# Altium PCB Copy of PCB1.PcbDoc
Units mm, origin at the board's own origin, x right, y up, seen from the top; angles counter-clockwise.
Board outline 113.79 x 108.71 mm, 2 copper layers (Top Layer, Bottom Layer); 82 components, 53 nets, 260 pads, 1 vias.
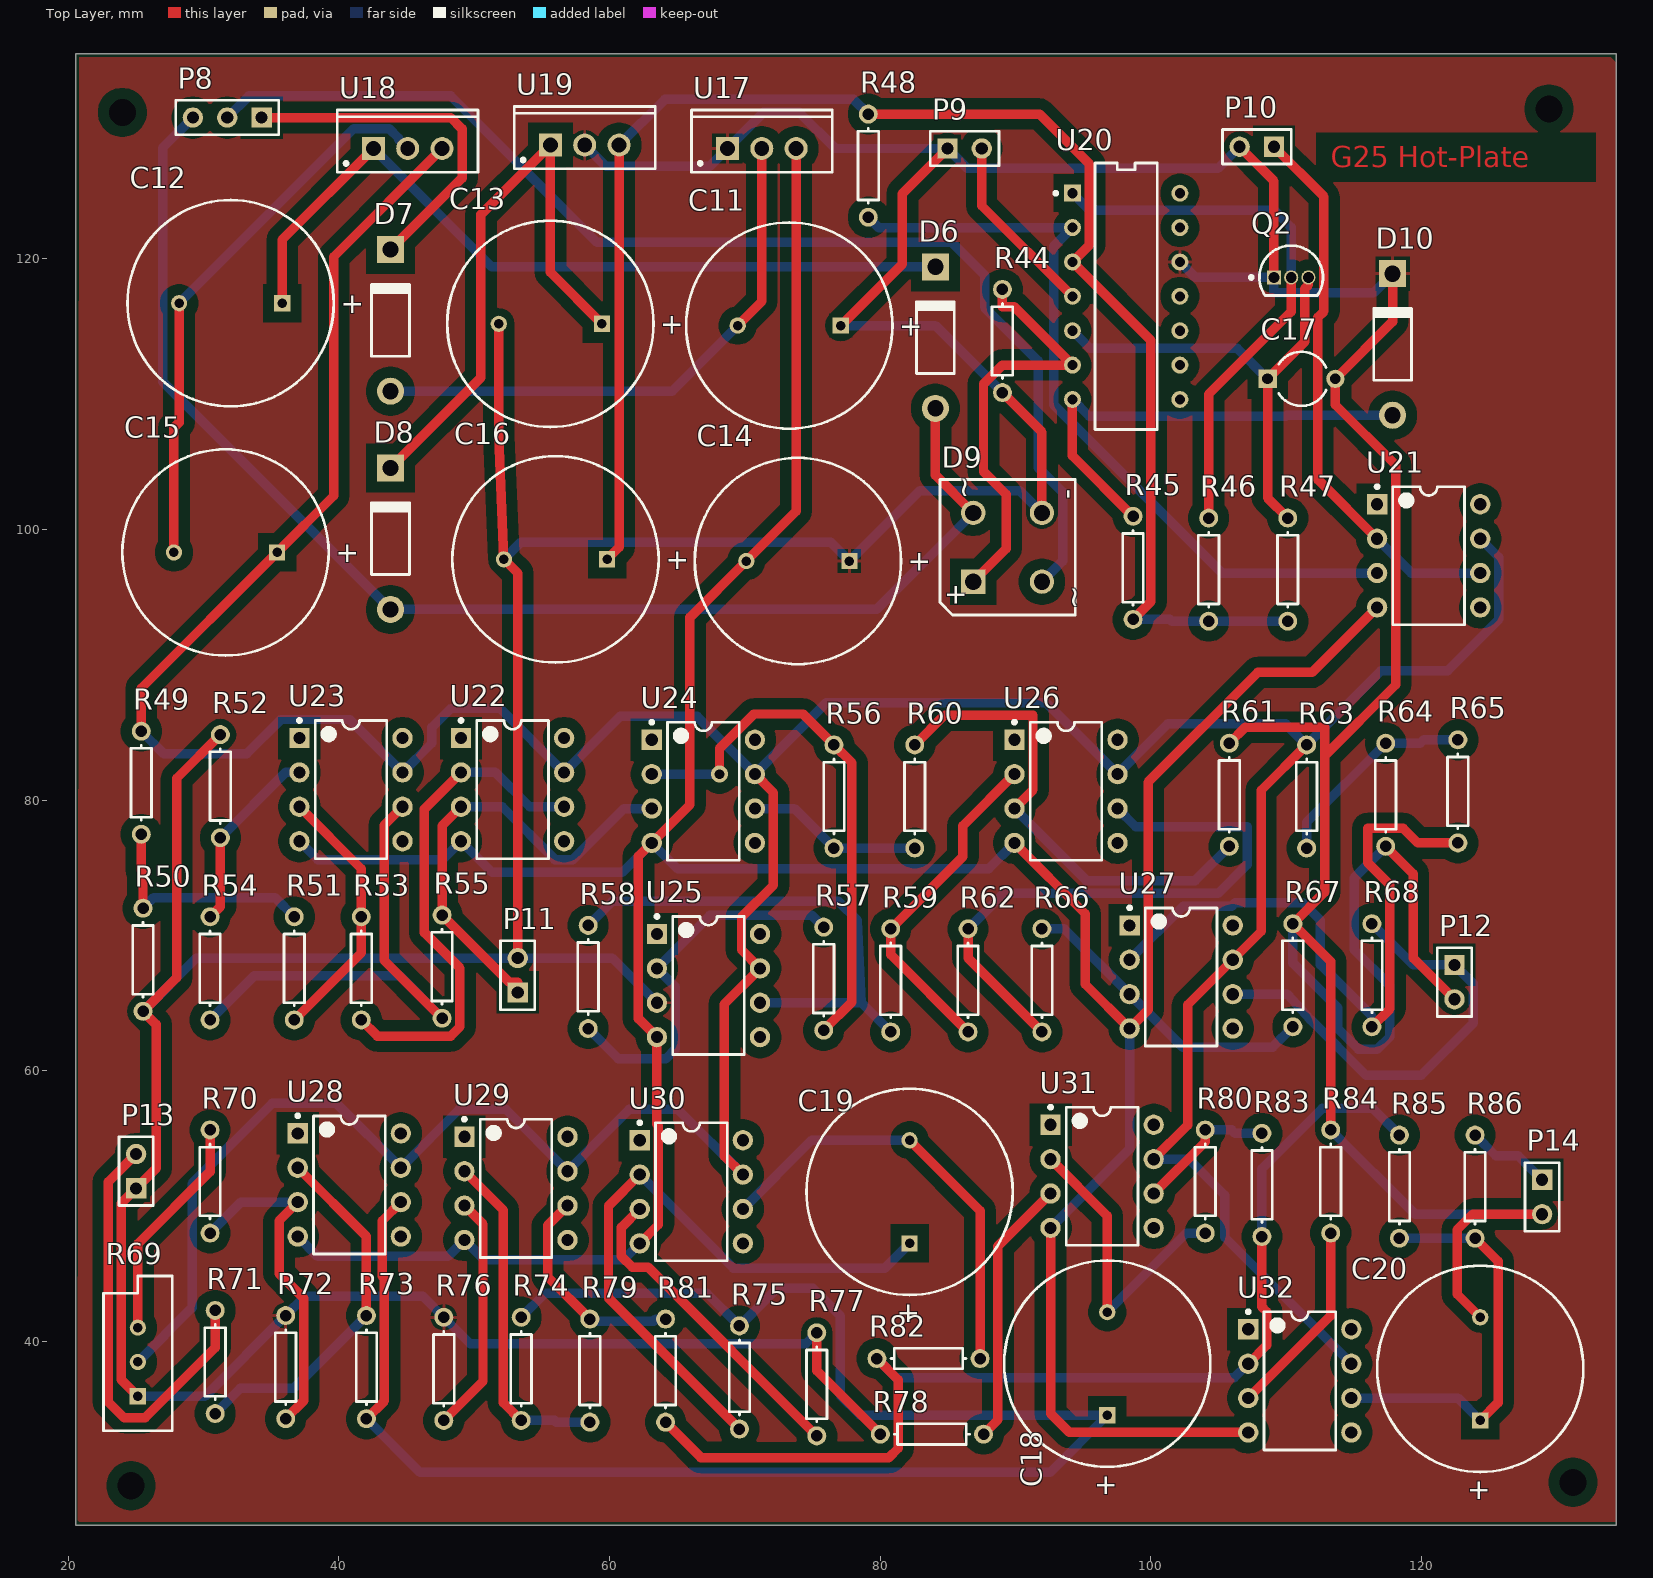
[diagram p0: Top Layer view]
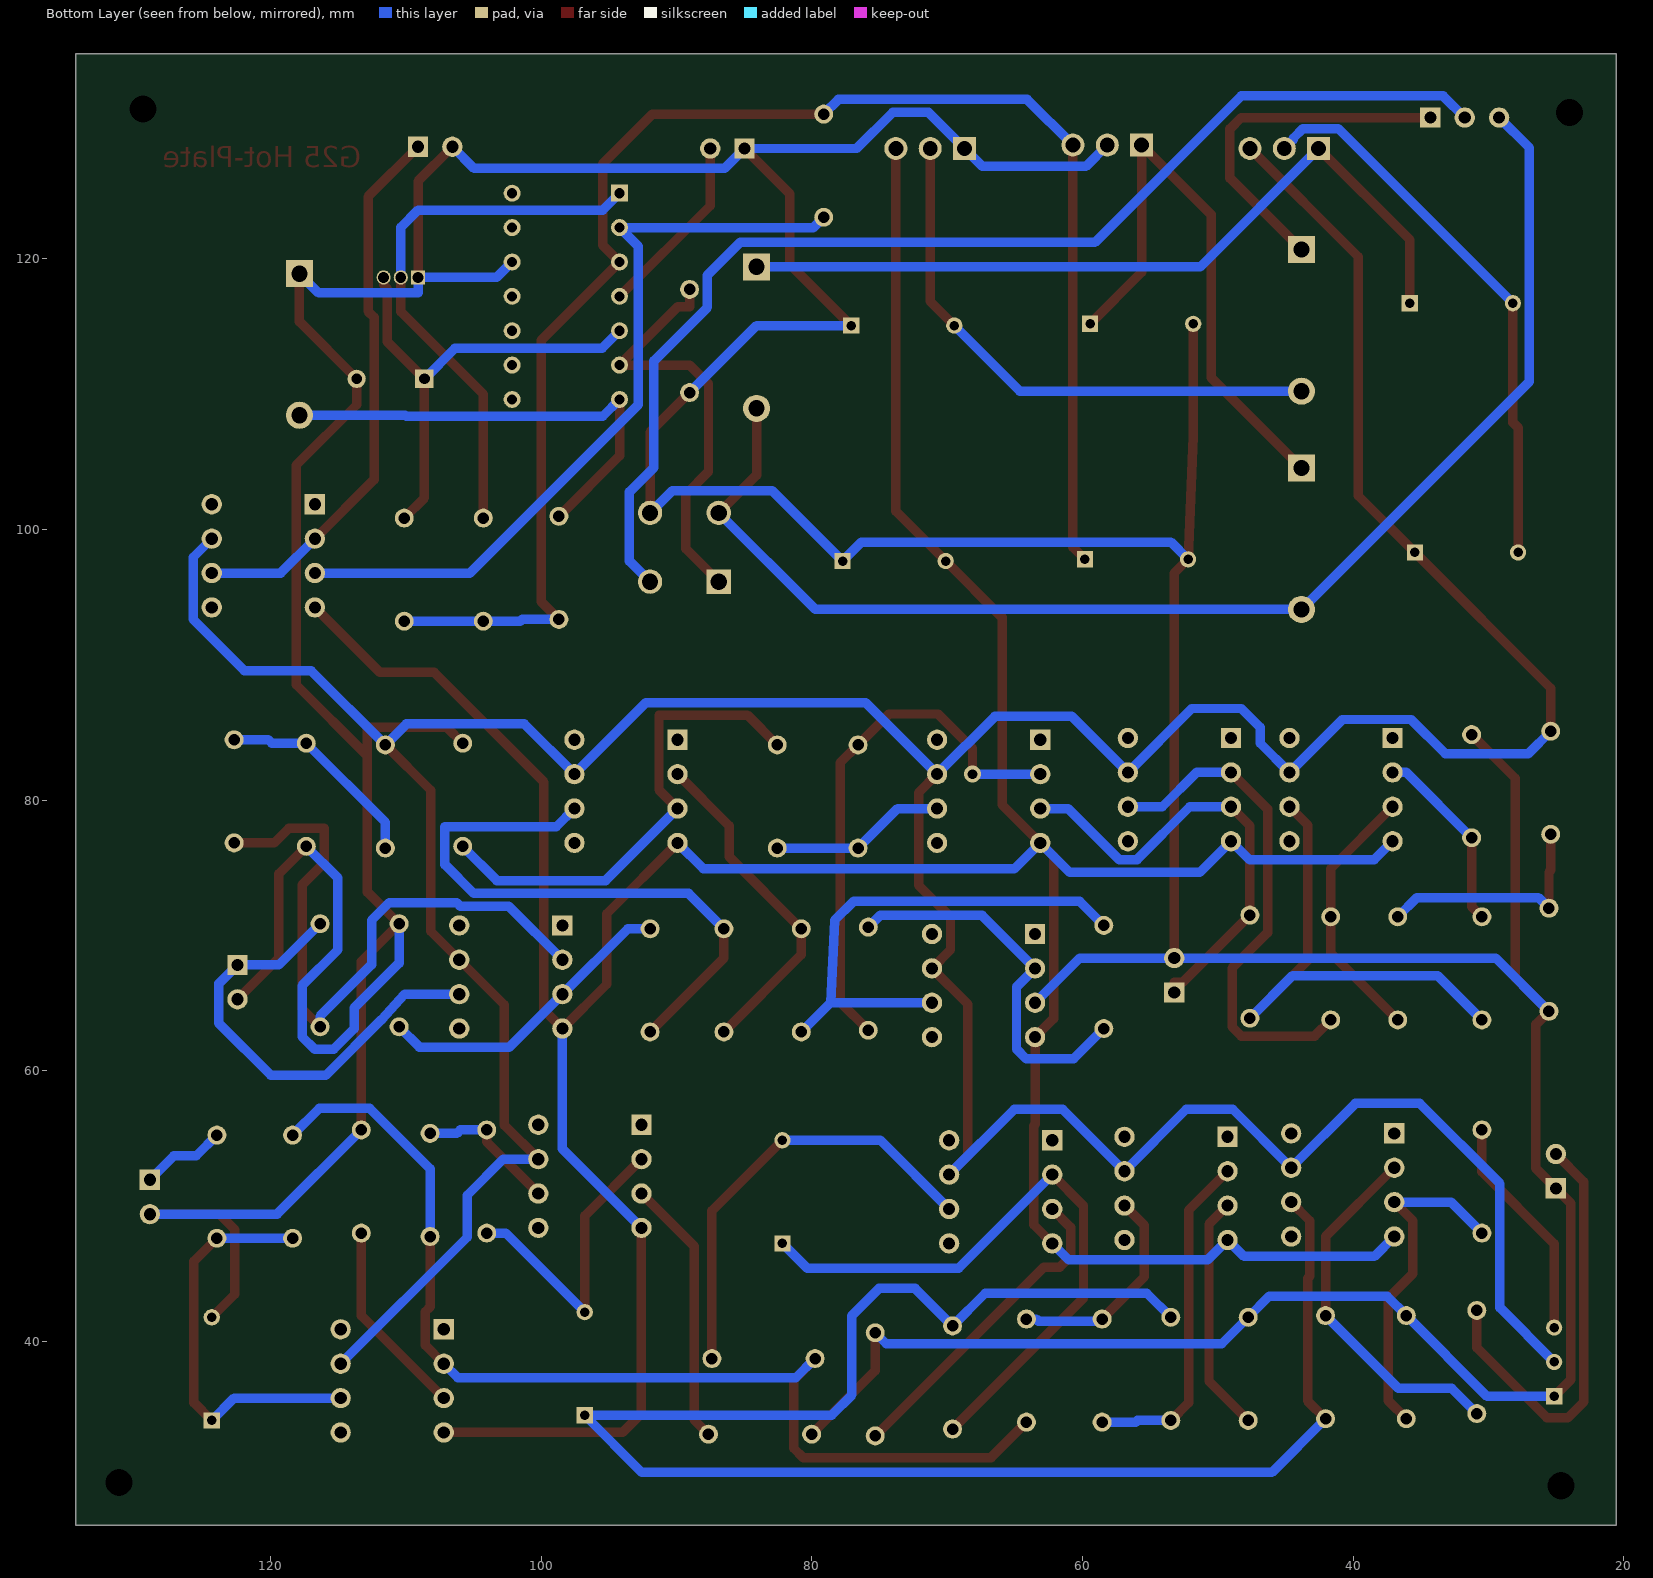
[diagram p1: Bottom Layer view, seen from below]

## Layer stack, top to bottom
Top Solder: solder mask 0.0102, Solder Resist, Dk 3.5
Top Layer: signal copper 0.0356
Dielectric 1: dielectric 0.32, FR-4, Dk 4.8
Bottom Layer: signal copper 0.0356
Bottom Solder: solder mask 0.0102, Solder Resist, Dk 3.5

## Board outline
20.574,26.416 134.366,26.416 134.366,135.128 20.574,135.128

## Design rules (kind name [scope] priority, off if disabled: settings)
Clearance "PolyGon Pour Clearence" [InPolygon] p1: gap=0.8 ignorepadtopadclearanceinfootprint=FALSE
Clearance [All] p2: gap=0.254 ignorepadtopadclearanceinfootprint=FALSE except(0: Arc-Hole Track-Hole SMDPad-Hole THPad-Hole Via-Hole Fill-Hole Poly-Hole Region-Hole Text-Hole)
PolygonConnect [All] p1: connectstyle=Relief reliefconductorwidth=0.254 reliefentries=4 polygonreliefangle="90 Angle" airgapwidth=0.254
RoutingVias [All] p1: holewidth=0.711 width=1.27 viastyle="Through Hole" minholewidth=0.711 minwidth=1.27 maxholewidth=0.711 maxwidth=1.27
SolderMaskExpansion [All] p1: expansion=0.102 istentingtop=FALSE
Width [All] p1: maxlimit=0.8 minlimit=0.7 preferedwidth=0.7 minimp=50.000000 maximp=50.000000 favimp=50.000000
30 further rules are at their usual default settings.

## Classes and differential pairs
component class Triac: C11 C12 C13 C14 C15 C16 C17 D6 D7 D8 D9 D10 P8 P9 P10 Q2 R44 R45 R46 R47 U17 U18 U19 U20 U21
component class sensor: P11 P12 R49 R50 R51 R52 R53 R54 R55 R56 R57 R58 R59 R60 R61 R62 R63 R64 R65 R66 R67 R68 U22 U23 U24 U25 U26 U27
component class pid: C18 C19 C20 P13 P14 R69 R70 R71 R72 R73 R74 R75 R76 R77 R78 R79 R80 R81 R82 R83 R84 R85 R86 U28 U29 U30 U31 U32

## Components (designator, comment, footprint, x,y, rotation, side; value= is the part's Value field where it differs from the comment)
C11 "Cap Pol1" RB7.6-15 73.279,115.062 r0 top value=100uF
C12 "Cap Pol1" RB7.6-15 32.004,116.713 r0 top value=100uF
C13 "Cap Pol1" RB7.6-15 55.626,115.189 r0 top value=100uF
C14 "Cap Pol1" RB7.6-15 73.914,97.663 r0 top value=100uF
C15 "Cap Pol1" RB7.6-15 31.623,98.298 r0 top value=100uF
C16 "Cap Pol1" RB7.6-15 56.007,97.79 r0 top value=100uF
C17 "Cap2" CAPR5-4X5 111.125,111.125 r0 top value=100nF
C18 "Cap Pol1" RB7.6-15 96.774,38.354 r270 top value=4.7uF
C19 "Cap Pol1" RB7.6-15 82.169,51.054 r270 top value=1uF
C20 "Cap Pol1" RB7.6-15 124.333,37.973 r270 top value=100pF
D6 "1N4001" DO-41 84.074,114.173 r90 top
D7 "1N4001" DO-41 43.815,115.443 r90 top
D8 "1N4001" DO-41 43.815,99.314 r90 top
D9 "Bridge" D-38 89.408,98.679 r90 top
D10 "1N4001" DO-41 117.856,113.665 r90 top
P8 "12AC" HDR1X3 34.29,130.429 r180 top
P9 "SENSOR OUT" HDR1X2 84.963,128.143 r0 top
P10 "Opto coupler" HDR1X2 109.093,128.27 r180 top
P11 "PT100" HDR1X2 53.213,65.786 r90 top
P12 "SENSOR OUT" HDR1X2 122.428,67.818 r270 top
P13 "PID IN" HDR1X2 25.019,51.308 r90 top
P14 "PID OUT" HDR1X2 128.905,51.943 r270 top
Q2 "2N3904" ONSC-TO-92-3-29-11 110.363,118.618 r0 top
R44 "Res1" AXIAL-0.3 89.027,113.919 r90 top value=24K
R45 "Res1" AXIAL-0.3 98.679,97.155 r90 top value=24K
R46 "Res1" AXIAL-0.3 104.267,97.028 r90 top value=24K
R47 "Res1" AXIAL-0.3 110.109,97.028 r90 top value=24K
R48 "Res1" AXIAL-0.3 79.121,126.873 r90 top value=24K
R49 "Res1" AXIAL-0.3 25.4,81.28 r90 top value=24K
R50 "Res1" AXIAL-0.3 25.527,68.199 r90 top value=24K
R51 "Res1" AXIAL-0.3 36.703,67.564 r90 top value=24K
R52 "Res1" AXIAL-0.3 31.242,81.026 r90 top value=24K
R53 "Res1" AXIAL-0.3 41.656,67.564 r90 top value=24K
R54 "Res1" AXIAL-0.3 30.48,67.564 r90 top value=24K
R55 "Res1" AXIAL-0.3 47.625,67.691 r90 top value=3.3K
R56 "Res1" AXIAL-0.3 76.581,80.264 r90 top value=10K
R57 "Res1" AXIAL-0.3 75.819,66.802 r90 top value=1K
R58 "Res1" AXIAL-0.3 58.42,66.929 r90 top value=10K
R59 "Res1" AXIAL-0.3 80.772,66.675 r90 top value=10K
R60 "Res1" AXIAL-0.3 82.55,80.264 r90 top value=10K
R61 "Res1" AXIAL-0.3 105.791,80.391 r90 top value=10K
R62 "Res1" AXIAL-0.3 86.487,66.675 r90 top value=10K
R63 "Res1" AXIAL-0.3 111.506,80.264 r90 top value=25K
R64 "Res1" AXIAL-0.3 117.348,80.391 r90 top value=25K
R65 "Res1" AXIAL-0.3 122.682,80.645 r270 top value=25K
R66 "Res1" AXIAL-0.3 91.948,66.675 r90 top value=25K
R67 "Res1" AXIAL-0.3 110.49,67.056 r90 top value=25K
R68 "Res1" AXIAL-0.3 116.332,67.056 r90 top value=25K
R69 "RPot" VR5 25.146,38.481 r90 top value=22K
R70 "Res1" AXIAL-0.3 30.48,51.816 r90 top value=24K
R71 "Res1" AXIAL-0.3 30.861,38.481 r90 top value=24K
R72 "Res1" AXIAL-0.3 36.068,38.1 r90 top value=24K
R73 "Res1" AXIAL-0.3 42.037,38.1 r90 top value=24K
R74 "Res1" AXIAL-0.3 53.467,37.973 r90 top value=10K
R75 "Res1" AXIAL-0.3 69.596,37.338 r90 top value=14.7K
R76 "Res1" AXIAL-0.3 47.752,37.973 r90 top value=24K
R77 "Res1" AXIAL-0.3 75.311,36.83 r90 top value=24K
R78 "Res1" AXIAL-0.3 83.82,33.147 r180 top value=24K
R79 "Res1" AXIAL-0.3 58.547,37.846 r270 top value=16.87K
R80 "Res1" AXIAL-0.3 104.013,51.816 r270 top value=3.65K
R81 "Res1" AXIAL-0.3 64.135,37.846 r90 top value=10K
R82 "Res1" AXIAL-0.3 83.566,38.735 r0 top value=10K
R83 "Res1" AXIAL-0.3 108.204,51.562 r90 top value=10K
R84 "Res1" AXIAL-0.3 113.284,51.816 r90 top value=24K
R85 "Res1" AXIAL-0.3 118.364,51.435 r90 top value=10K
R86 "Res1" AXIAL-0.3 123.952,51.435 r270 top value=10K
U17 "L7912CV" TO-220 71.247,128.143 r0 top
U18 "L7812CV" TO220 45.085,128.143 r0 top
U19 "L7812CV" TO220 58.166,128.397 r0 top
U20 "LM339N" FP-N0014A-MFG 98.171,117.221 r0 top
U21 "UA741CP" P0008A 120.523,98.044 r0 top
U22 "UA741CP" P0008A 52.832,80.772 r0 top
U23 "UA741CP" P0008A 40.894,80.772 r0 top
U24 "UA741CP" P0008A 66.929,80.645 r0 top
U25 "UA741CP" P0008A 67.31,66.294 r0 top
U26 "UA741CP" P0008A 93.726,80.645 r0 top
U27 "UA741CP" P0008A 102.235,66.929 r0 top
U28 "UA741CP" P0008A 40.767,51.562 r0 top
U29 "UA741CP" P0008A 53.086,51.308 r0 top
U30 "UA741CP" P0008A 66.04,51.054 r0 top
U31 "UA741CP" P0008A 96.393,52.197 r0 top
U32 "UA741CP" P0008A 110.998,37.084 r0 top

## Footprints (in the part's own frame and the unit in brackets; to place one, negate y for a bottom-side part, rotate by r counter-clockwise, add the part's x,y. Pads: shape width x height; smd on the part's side, far side on the other; paste and mask are expansions set on the pad)
AXIAL-0.3 [mm] "Axial Device, Thru-Hole; 2 Leads; 0.3 in Pin Spacing"
  round 1.4 hole 0.85: 1(-3.81,0) 2(3.81,0)
  silkscreen extent -2.77,-0.76 2.77,0.76
CAPR5-4X5 [mm] "Capacitor; 2 Leads"
  rect 1.35x1.35 hole 0.8: 1(-2.5,0)
  round 1.35 hole 0.8: 2(2.5,0)
  silkscreen extent -1.69,-2 1.82,2
D-38 [mm] "Bridge Rectifier; 4 Terminals; Body 9.4 x 9.4 mm (typ); Pitch 5.08 mm"
  rect 1.8x1.8 hole 1.2: 1(-2.54,2.54)
  round 1.8 hole 1.2: 2(-2.54,-2.54) 3(2.54,-2.54) 4(2.54,2.54)
  silkscreen extent -5,-5 5,5, body extent -5,-5 5,5, height 9.91
DO-41 [mm] "Diode, Axial; Body 5.2 x 2.7 mm (LxDia. max), Lead Dia. 0.86 mm (max)"
  round 2 hole 1.2: 1(-5.23,0)
  rect 2x2 hole 1.2: 2(5.23,0)
  silkscreen extent -2.65,-1.4 2.75,1.4
FP-N0014A-MFG [mm]
  rect 1.25x1.25 hole 0.75 paste-1000 mask+0: 1(-3.97,7.62)
  round 1.25 hole 0.75 paste-1000 mask+0: 2(-3.97,5.08) 3(-3.97,2.54) 4(-3.97,0) 5(-3.97,-2.54) 6(-3.97,-5.08) 7(-3.97,-7.62) 8(3.97,-7.62) 9(3.97,-5.08) 10(3.97,-2.54) 11(3.97,0) 12(3.97,2.54) 13(3.97,5.08) 14(3.97,7.62)
  silkscreen extent -5.32,-9.84 2.3,9.84, body extent -4.69,-9.94 4.69,9.94, height 0.25
HDR1X2 [mm] "Connector; Header; 2 Position"
  rect 1.5x1.5 hole 0.9: 1(0,0)
  round 1.5 hole 0.9: 2(2.54,0)
  silkscreen extent -1.27,-1.27 3.81,1.27
HDR1X3 [mm] "Connector; Header; 3 Position"
  rect 1.5x1.5 hole 0.9: 1(0,0)
  round 1.5 hole 0.9: 2(2.54,0) 3(5.08,0)
  silkscreen extent -1.27,-1.27 6.35,1.27
ONSC-TO-92-3-29-11 [mm] "TO, 3-Leads, Body Dia 4.7mm, Pitch 1.27mm"
  rect 1.05x1.05 hole 0.8: 1(-1.27,0)
  round 1.05 hole 0.8: 2(0,0) 3(1.27,0)
  silkscreen extent -3.07,-1.34 2.35,2.35, body extent -2.35,-1.33 2.36,2.36, height 7.87
P0008A [mm] "DIP, 8-Leads, Body 10.15x6.6mm, Pitch 2.54mm"
  rect 1.5x1.5 hole 0.9: 1(-3.81,3.81)
  round 1.5 hole 0.9: 2(-3.81,1.27) 3(-3.81,-1.27) 4(-3.81,-3.81) 5(3.81,-3.81) 6(3.81,-1.27) 7(3.81,1.27) 8(3.81,3.81)
  silkscreen extent -3.93,-5.1 2.65,5.23, body extent -3.95,-5.07 3.95,5.07, height 5.08
RB7.6-15 [mm] "Polarized Capacitor (Radial); 2 Leads"
  rect 1.2x1.2 hole 0.7: 1(3.81,0)
  round 1.2 hole 0.7: 2(-3.81,0)
  silkscreen extent -7.62,-7.62 7.62,7.62
TO220 [mm] "TO, Thru-Hole, Vertical, Heatsink Mounted; 3 In-Line Leads; Pitch 2.54 mm"
  rect 1.7x1.7 hole 1.1: 1(-2.54,0)
  round 1.7 hole 1.1: 2(0,0) 3(2.54,0)
  silkscreen extent -5.2,-1.75 5.2,2.85, body extent -5.25,-1.8 5.25,2.9, height 19.7
TO-220 [mm] "TO, Thru-Hole, Vertical, Heatsink Mounted; 3 In-Line Leads; Pitch 2.54 mm"
  rect 1.7x1.7 hole 1.1: 1(-2.54,0)
  round 1.7 hole 1.1: 2(0,0) 3(2.54,0)
  silkscreen extent -5.2,-1.75 5.2,2.85, body extent -5.25,-1.8 5.25,2.9, height 19.7
VR5 [mm] "Thru-Hole; 3 Leads"
  rect 1.2x1.2 hole 0.7: 1(-2.54,0)
  round 1.2 hole 0.7: 2(0,0) 3(2.54,0)
  silkscreen extent -5.08,-2.54 6.35,2.54

## Part data
C11 C12 C13 C14 C15 C16 C18 C19 C20: "Polarized Capacitor (Radial)", LatestRevisionDate=17-Jul-2002, LatestRevisionNote="Re-released for DXP Platform.", PackageDescription="Polarized Capacitor (Radial); 2 Leads", PackageReference=RB7.6-15, Published=8-Jun-2000, Publisher="Altium Limited"
C17: "Capacitor", PackageDescription="Capacitor; 2 Leads", PackageReference=CAPR5-4X5, Published=23-Sep-2002, Publisher="Altium Limited"
D6 D7 D8 D10: library part "Diode 1N4001", "1 Amp General Purpose Rectifier", Code_JEDEC=DO-204-AL, ComponentLink1Description="Manufacturer Link", ComponentLink1URL=http://www.fairchildsemi.com/, ComponentLink2Description=Datasheet, ComponentLink2URL=http://www.fairchildsemi.com/ds/1N%2F1N4001.pdf, DatasheetVersion=1998, LatestRevisionDate=17-Jul-2002, LatestRevisionNote="Re-released for DXP Platform.", PackageDescription="Diode, Axial; Body 5.2 x 2.7 mm (LxDia. max), Lead Dia. 0.86 mm (max)", PackageReference=DO-41, PackageVersion=Aug-1999, Published=8-Jun-2000, Publisher="Altium Limited"
D9: library part Bridge1, "Full Wave Diode Bridge", DatasheetVersion=E2732B, LatestRevisionDate=29-May-2009, LatestRevisionNote="Sch pins A & K swapped.", PackageDescription="Bridge Rectifier; 4 Terminals; Body 9.4 x 9.4 mm (typ); Pitch 5.08 mm", PackageReference=D-38, Published=8-Jun-2000, Publisher="Altium Limited"
P8: library part "Header 3", "Header, 3-Pin", LatestRevisionDate=17-Jul-2002, LatestRevisionNote="Re-released for DXP Platform.", Publisher="Altium Limited"
P9 P10 P11 P12 P13 P14: library part "Header 2", "Header, 2-Pin", LatestRevisionDate=17-Jul-2002, LatestRevisionNote="Re-released for DXP Platform.", Publisher="Altium Limited"
Q2: library part CMP-2000-05562-1, "General Purpose Transistor, NPN Silicon, 200 mA, 60 V, -55 to 150 degC, 3-Pin TO-92, RoHS, Bulk", Collector- Base Voltage VCBO=60V, Collector- Emitter Voltage VCEO Max=40V, Collector-Emitter Saturation Voltage=0.3V, Emitter- Base Voltage VEBO=6V, Manufacturer=ONSemiconductor, Maximum DC Collector Current=0.2A, Maximum Operating Temperature=+150C, Maximum Power Dissipation=625mW, Minimum Operating Temperature=-65C, Package / Case=TO-92-3(TO-226), Package Description="3-Pin Transistor Outline, Body 4.825 x 3.685 mm, Pitch 1.27 mm", Package Reference=TO-92-3-29-11, Brand=ONSemiconductor, Configuration=Single, Datasheet URL=https://datasheet.ciiva.com/4725/2n3903-d-285841-4725808.pdf, Datasheet Version="Rev. 8, 08/2012", DC Collector/Base Gain hfe Min=60, Factory Pack Quantity=5000, Gain Bandwidth Product fT=270MHz, Manufacturer URL=http://www.onsemi.com/, Mounting Style=ThroughHole, Mounting Technology=ThroughHole, Packaging=Bulk, Product Category=BipolarTransistors-BJT, RoHS=Details, Transistor Polarity=NPN
R44 R45 R46 R47 R48 R49 R50 R51 R52 R53 R54 R55 R56 R57 R58 R59 R60 R61 R62 R63 R64 R65 R66 R67 R68 R70 R71 R72 R73 R74 R75 R76 R77 R78 R79 R80 R81 R82 R83 R84 R85 R86: "Resistor", LatestRevisionDate=17-Jul-2002, LatestRevisionNote="Re-released for DXP Platform.", PackageDescription="Axial Device, Thru-Hole; 2 Leads; 0.3 in Pin Spacing", PackageReference=AXIAL-0.3, Published=8-Jun-2000, Publisher="Altium Limited"
R69: "Potentiometer", LatestRevisionDate=17-Jul-2002, LatestRevisionNote="Re-released for DXP Platform.", PackageDescription="Variable Resistor, Thru-Hole; 3 Leads", PackageReference=VR5, Published=8-Jun-2000, Publisher="Altium Limited", Set Position=0.5, Sim Note="Enter the Resistance value and the set point into parameter fields."
U17: library part CMP-0244-00457-1, "Negative Voltage Regulator, -12V, 3-Pin TO-220", ComponentLink1Description="Manufacturer URL", ComponentLink1URL=http://www.st.com, ComponentLink2Description=Datasheet, ComponentLink2URL=http://www.st.com/internet/com/TECHNICAL_RESOURCES/TECHNICAL_LITERATURE/DATASHEET/CD00000450.pdf, DatasheetVersion=1/11/2011, PackageDescription="TO, Thru-Hole, Vertical, Heatsink Mounted; 3 In-Line Leads; Pitch 2.54 mm", PackageReference=TO-220, PackageVersion=2011
U18 U19: library part CMP-0244-00450-1, "Positive Voltage Regulator, 12V, 3-Pin TO-220", ComponentLink1Description="Manufacturer URL", ComponentLink1URL=http://www.st.com, ComponentLink2Description=Datasheet, ComponentLink2URL=http://www.st.com/internet/com/TECHNICAL_RESOURCES/TECHNICAL_LITERATURE/DATASHEET/CD00000444.pdf, ComponentLink3Description="Package Specification", ComponentLink3URL=http://www.st.com/internet/com/TECHNICAL_RESOURCES/TECHNICAL_LITERATURE/PACKAGE_INFORMATION/CD00004649.pdf, DatasheetVersion=16/11/2011, PackageDescription="TO, Thru-Hole, Vertical, Heatsink Mounted; 3 In-Line Leads; Pitch 2.54 mm", PackageReference=TO220, PackageVersion=ver3.0
U20: library part CMP-0055-00143-4, "IC QUAD DIFF COMPARATOR 14-DIP", Case/Package=PDIP, Dual Supply Voltage=9V, Input Bias Current=250nA, Input Offset Voltage (Vos)=5mV, Max Dual Supply Voltage=15V, Max Operating Temperature=70°C, Max Power Dissipation=1.05W, Max Supply Current=500uA, Max Supply Voltage=30V, Min Dual Supply Voltage=1V, Min Operating Temperature=0°C, Min Supply Voltage=2V, Nominal Supply Current=2mA, Output Current=20mA, Output Current per Channel=6mA, Package Quantity=25, Power Dissipation=1.05kW, Quiescent Current=2.5mA, Voltage Gain=106.02dB, Contact Plating=Gold, Height=4.57mm, Lead Free="Lead Free", Length=19.3mm, Max Input Current=250nA, Mount="Through Hole", Number of Channels=4, Number of Elements=4, Number of Pins=14, Output Type=TTL, Packaging=Rail/Tube, Radiation Hardening=No, REACH SVHC="No SVHC", Response Time=1.3us, Weight=0.032734oz, Width=6.35mm
U21 U22 U23 U24 U25 U26 U27 U28 U29 U30 U31 U32: library part CMP-0017-00973-2, "General-Purpose Operational Amplifier, 7 to 36 V, 0 to 70 degC, 8-pin DIP (P8), Pb-Free (RoHS)", Manufacturer="Texas Instruments", Total Supply Voltage(Max)(+5V is 5, +/-5V is 10)=36, Total Supply Voltage(Min)(+5V is 5, +/-5V is 10)=7, CMRR(Min)(dB)=70, Code_JEDEC=MS-001, ComponentLink1Description="Manufacturer URL", ComponentLink1URL=http://www.ti.com/, ComponentLink2Description=Datasheet, ComponentLink2URL=http://www.ti.com/lit/ds/symlink/ua741.pdf, ComponentLink3Description="Package Specification", ComponentLink3URL=http://www.ti.com/litv/pdf/mpdi001b, DatasheetVersion=SLOS094B, Eco-Plan="Pb-Free (RoHS)", GBW(Typ)(MHz)=1, IIB(Max)(pA)=800000, Iq per channel(Max)(mA)=2.8, Mounting Technology="Through Hole", Number of Channels=1, PackageDescription="8-Pin Plastic In-Line, Body 9.59 x 6.35 mm, Pitch 2.54 mm", PackageReference=P0008A, PackageVersion="4040082/E, 04/2010", PartNumber=UA741CP, Slew Rate(Typ)(V/us)=0.5, Sub Family="General Purpose Amplifier, High Supply Voltage Amplifier (>=30V)", Vio (25C)(Max)(mV)=6

## Free pads (board coordinates)
  round 1.524 hole 2: 33(129.413,131.064) 37(131.191,29.591) 38(24.638,29.337) 39(24.003,130.81)

## Via types
v1: diameter 1.27, hole 0.711, Top Layer to Bottom Layer, 1 vias

## Nets (pads, with @x,y where several pads share a name; then routed paths per layer and width w, separated by ;. In a path a pad name is that pad's centre, name@x,y a point inside that pad or via, vN(x,y) a via of type N, cw(c..) or ccw(c..) an arc to the next point about the centre after c; other vN are vias at no path point)
+12V: C15.1 R49.2 R63.2 R69.2 U18.3 U21.7 U22.7 U23.7 U24.7 U25.7 U26.7 U27.7 U28.7 U29.7 U30.7 U31.7 U32.7 | length 339.8
  Top Layer w0.7: R49.2 25.4,88.265 C15.1 39.624,102.489 39.624,120.142 U18.3 ; U30.7 68.478,53.696 68.478,64.922 U25.7 69.748,68.936 69.748,71.349 72.111,73.711 72.111,80.543 U24.7 ; U31.7 102.718,55.982 102.718,64.872 U27.7 108.153,70.307 108.153,80.721 R63.2
  Bottom Layer w0.7: R69.2 29.159,42.494 29.159,51.664 35.077,57.582 39.827,57.582 U28.7 48.895,57.15 52.324,57.15 U29.7 61.468,57.15 65.024,57.15 U30.7 ; R49.2 27.051,83.439 33.198,83.439 35.712,85.954 40.792,85.954 U23.7 46.863,84.201 46.863,85.369 48.26,86.766 51.918,86.766 U22.7 60.782,86.182 66.472,86.182 U24.7 76.022,87.198 92.253,87.198 U26.7 101.244,85.623 109.957,85.623 R63.2 116.992,89.56 121.92,89.56 125.705,93.345 125.705,97.942 U21.7 ; U31.7 102.794,53.467 105.461,50.8 105.461,47.701 U32.7
-12V: C14.2 U17.3 U21.4 U22.4 U23.4 U24.4 U25.4 U26.4 U27.4 U28.4 U29.4 U30.4 U31.4 U32.4 | length 276.1
  Top Layer w0.7: U30.4 63.602,48.616 63.602,55.931 63.5,56.032 U25.4 62.128,63.856 62.128,75.844 U24.4 65.941,79.657 65.941,93.5 C14.2 73.787,101.346 U17.3 ; U26.4 95.148,71.603 95.148,66.396 U27.4 99.797,64.491 99.797,81.331 107.899,89.433 111.912,89.433 U21.4 ; U31.4 92.583,34.671 93.98,33.274 U32.4
  Bottom Layer w0.7: U28.4 38.43,46.279 48.057,46.279 U29.4 50.749,46.025 61.011,46.025 U30.4 ; U23.4 38.456,75.59 47.65,75.59 U22.4 51.33,74.654 60.938,74.654 U24.4 65.024,74.93 88.011,74.93 U26.4 ; U31.4 98.425,54.229 U27.4
GND: C11.1 C13.2 C14.1 C16.2 C17.2 C20.2 D9.3 D10.2 P9.1 P10.2 P11.2 P12.2 P13.1 P14.2 Q2.1 R44.1 R50.1 R52.2 R61.2 R64.1 R67.2 R69.1 R72.2 R76.2 R77.2 R78.2 R84.2 U17.1 U19.2 U20.12 U25.3 | length 528.2
  Top Layer w0.7: R69.1 23.927,37.16 23.927,50.216 P13.1 26.492,52.781 26.492,63.424 R50.1 28.016,66.878 28.016,81.61 R52.2 ; C13.2 51.816,106.883 C16.2 53.213,96.774 P11.2 ; R77.2 75.311,37.846 R78.2 ; C11.1 81.636,119.609 81.636,124.816 P9.1 ; R44.1 91.948,107.188 D9.3 ; R61.2 106.985,85.395 112.827,85.395 112.827,83.261 ; P10.2 109.093,125.73 Q2.1 ; R84.2 113.284,68.072 R67.2 112.827,73.203 112.827,83.261 ; R64.1 119.38,74.549 119.38,68.326 P12.2 ; D10.2 117.856,115.356 C17.2 113.625,109.209 118.085,104.75 118.085,88.519 112.827,83.261 ; C20.2 122.631,43.485 122.631,48.26 123.774,49.403 P14.2
  Bottom Layer w0.7: R69.1 30.099,35.941 R72.2 37.49,43.332 46.203,43.332 R76.2 49.708,39.827 74.498,39.827 R77.2 ; R50.1 29.464,68.326 P11.2 60.198,68.326 U25.3 ; C16.2 53.467,99.06 76.327,99.06 C14.1 82.906,102.845 90.322,102.845 D9.3 ; U19.2 59.741,126.822 67.386,126.822 U17.1 71.374,130.81 74.016,130.81 76.683,128.143 P9.1 86.436,126.67 104.953,126.67 P10.2 ; C11.1 84.074,115.062 R44.1 ; U20.12 103.284,118.618 Q2.1 109.093,117.475 116.436,117.475 D10.2 ; R67.2 110.49,67.957 113.811,64.636 113.811,63.1 115.316,61.595 116.738,61.595 117.653,62.509 117.653,66.294 115.011,68.936 115.011,74.244 R64.1 ; R84.2 119.507,49.403 P14.2
NetC11_2: C11.2 D7.1 U17.2 | length 41.5
  Top Layer w0.7: C11.2 71.247,116.84 U17.2
  Bottom Layer w0.7: D7.1 64.62,110.213 C11.2
NetC12_1: C12.1 D6.2 U18.1 | length 59.4
  Top Layer w0.7: C12.1 35.814,121.412 U18.1
  Bottom Layer w0.7: U18.1 51.285,119.403 D6.2
NetC12_2: C12.2 C15.2 U18.2 | length 41.5
  Top Layer w0.7: C15.2 27.813,107.518 28.194,107.899 C12.2
  Bottom Layer w0.7: C12.2 41.097,129.616 43.713,129.616 44.425,128.905 44.425,128.803 U18.2
NetC13_1: C13.1 D8.2 U19.1 | length 43.5
  Top Layer w0.7: D8.2 50.495,111.224 50.495,123.266 U19.1 55.626,118.999 C13.1
NetC16_1: C16.1 R45.1 R46.1 R47.1 R48.2 U19.3 U20.3 | length 117.7
  Top Layer w0.7: C16.1 60.706,98.679 U19.3 ; R48.2 91.77,130.683 95.453,127 95.453,121.013 U20.3 100,113.962 100,94.666 R45.1
  Bottom Layer w0.7: U19.3 64.084,131.775 78.029,131.775 R48.2 ; R45.1 101.397,93.345 101.524,93.218 R46.1 R47.1
NetC17_1: C17.1 Q2.3 R47.2 U20.5 | length 35.5
  Top Layer w0.7: R47.2 108.625,102.322 C17.1 111.354,113.854 111.354,117.78 111.633,118.059 Q2.3
  Bottom Layer w0.7: U20.5 95.496,113.386 106.364,113.386 C17.1
NetC18_1: C18.1 R73.1 R74.2 R75.2 U28.6 | length 128.8
  Top Layer w0.7: R73.1 43.358,35.611 43.358,44.653 43.205,44.806 43.205,48.92 U28.6
  Bottom Layer w0.7: R73.1 45.999,30.328 92.558,30.328 C18.1 78.537,34.544 77.038,36.043 77.038,41.91 75.032,43.917 72.365,43.917 R75.2 67.18,43.564 55.248,43.564 R74.2
NetC18_2: C18.2 R80.2 U31.2 | length 22.7
  Top Layer w0.7: U31.2 96.774,49.276 C18.2
  Bottom Layer w0.7: C18.2 102.616,48.006 R80.2
NetC19_1: C19.1 R75.1 U30.2 | length 47.3
  Top Layer w0.7: U30.2 59.922,50.016 59.922,43.202 R75.1
  Bottom Layer w0.7: U30.2 69.139,45.415 80.34,45.415 C19.1
NetC19_2: C19.2 R82.2 U30.6 | length 32.7
  Top Layer w0.7: C19.2 87.376,49.657 R82.2
  Bottom Layer w0.7: U30.6 74.93,54.864 C19.2
NetC20_1: C20.1 R85.1 R86.2 U32.6 | length 30.5
  Top Layer w0.7: R86.2 125.654,45.923 125.654,35.484 C20.1
  Bottom Layer w0.7: U32.6 122.682,35.814 C20.1 ; R85.1 R86.2
NetD6_1: D6.1 D8.1 D9.4 P8.3 | length 99.1
  Top Layer w0.7: D6.1 84.074,104.013 D9.4
  Bottom Layer w0.7: P8.3 26.975,128.194 26.975,110.924 D8.1 79.733,94.084 D9.4
NetD7_2: D7.2 P8.1 | length 26.3
  Top Layer w0.7: P8.1 48.26,130.429 49.098,129.591 49.098,125.956 D7.2
NetD9_1: D9.1 R44.2 U20.6 | length 31.7
  Top Layer w0.7: D9.1 89.306,98.577 89.306,102.591 87.63,104.267 87.63,110.744 89.027,112.141 U20.6 89.883,116.459 89.027,116.459 R44.2
NetD9_2: D9.2 P8.2 | length 87.8
  Bottom Layer w0.7: P8.2 33.35,132.029 48.26,132.029 59.08,121.209 85.293,121.209 87.706,118.796 87.706,116.408 91.669,112.446 91.669,104.572 93.472,102.768 93.472,97.663 D9.2
NetD10_1: D10.1 R45.2 U20.7 | length 34.7
  Top Layer w0.7: U20.7 94.201,105.443 R45.2
  Bottom Layer w0.7: U20.7 95.446,108.356 109.957,108.356 110.035,108.435 D10.1
NetP9_2: P9.2 U20.4 | length 13.7
  Top Layer w0.7: P9.2 87.503,123.919 U20.4
NetP10_1: P10.1 U21.2 U21.6 | length 41.1
  Top Layer w0.7: P10.1 112.776,124.587 112.776,116.103 112.344,115.672 112.344,103.683 U21.2
  Bottom Layer w0.7: U21.2 119.253,96.774 U21.6
NetP11_1: P11.1 R55.2 U22.3 U24.3 | length 34.3
  Top Layer w0.7: U22.3 47.625,78.105 R55.2 52.578,66.548 53.213,66.548 P11.1
  Bottom Layer w0.7: U22.3 52.07,79.502 55.964,75.608 57.295,75.608 61.062,79.375 U24.3
NetP12_1: P12.1 R68.2 U27.6 | length 34.1
  Bottom Layer w0.7: U27.6 110.084,65.659 111.785,63.776 115.897,59.665 119.964,59.665 123.8,63.5 123.8,66.446 P12.1 119.38,67.818 R68.2
NetP13_2: P13.2 R71.2 | length 32.4
  Top Layer w0.7: P13.2 22.962,51.791 22.962,35.535 24.13,34.366 25.679,34.366 30.861,39.548 R71.2
NetP14_1: P14.1 R86.1 | length 6.3
  Bottom Layer w0.7: R86.1 125.476,53.721 127.127,53.721 P14.1
NetQ2_2: Q2.2 R46.2 U20.1 | length 41.2
  Top Layer w0.7: R46.2 104.267,109.982 110.363,116.078 Q2.2
  Bottom Layer w0.7: U20.1 95.446,123.596 109.093,123.596 110.363,122.326 Q2.2
NetR48_1: R48.1 U20.2 U21.3 | length 58.1
  Bottom Layer w0.7: R48.1 79.883,122.301 U20.2 92.812,120.912 92.812,109.22 105.258,96.774 U21.3
NetR49_1: R49.1 R50.2 R51.2 | length 17.6
  Top Layer w0.7: R49.1 25.4,74.803 25.527,74.676 R50.2
  Bottom Layer w0.7: R50.2 26.314,72.796 35.281,72.796 R51.2
NetR51_1: R51.1 R53.2 U23.3 | length 19.7
  Top Layer w0.7: R51.1 41.656,68.707 R53.2 41.656,74.93 U23.3
NetR52_1: R52.1 R54.2 U23.2 | length 14
  Top Layer w0.7: R54.2 31.242,72.136 R52.1
  Bottom Layer w0.7: R52.1 36.068,82.042 U23.2
NetR53_1: R53.1 U22.2 U22.6 | length 37.7
  Top Layer w0.7: R53.1 42.85,62.56 48.26,62.56 48.946,63.246 48.946,67.581 46.321,70.206 46.321,79.341 U22.2
  Bottom Layer w0.7: U22.2 51.562,82.042 54.102,79.502 U22.6
NetR54_1: R54.1 R55.1 U23.6 | length 37.8
  Top Layer w0.7: U23.6 43.35,78.148 43.35,68.156 R55.1
  Bottom Layer w0.7: R54.1 33.757,67.031 44.475,67.031 R55.1
NetR56_1: R56.1 R60.1 U24.6 | length 13
  Bottom Layer w0.7: U24.6 73.66,79.375 R56.1 R60.1
NetR56_2: R56.2 R57.1 U24.2 | length 39.9
  Top Layer w0.7: v1(68.123,81.915) 68.123,83.82 70.663,86.36 74.295,86.36 R56.2 77.902,82.753 77.902,65.075 R57.1
  Bottom Layer w0.7: U24.2 v1(68.123,81.915)
NetR57_2: R57.2 R58.1 U25.2 | length 28.5
  Bottom Layer w0.7: R58.1 60.655,60.884 64.16,60.884 64.872,61.595 64.872,66.192 U25.2 67.412,71.476 74.955,71.476 R57.2
NetR58_2: R58.2 R59.1 U25.6 | length 37.9
  Bottom Layer w0.7: R58.2 60.198,72.517 76.911,72.517 78.308,71.12 78.613,65.024 ; U25.6 78.613,65.024 ; R59.1 78.613,65.024
NetR59_2: R59.2 R62.1 U26.2 | length 25.2
  Top Layer w0.7: R62.1 80.772,68.58 R59.2 86.106,75.819 86.106,78.105 U26.2
NetR60_2: R60.2 R61.1 U26.3 | length 36.3
  Top Layer w0.7: R60.2 84.76,86.284 91.288,86.284 91.288,80.747 U26.3
  Bottom Layer w0.7: U26.3 95.236,74.055 103.265,74.055 R61.1
NetR62_2: R62.2 R66.1 U26.6 | length 45.4
  Top Layer w0.7: R62.2 86.487,68.326 R66.1
  Bottom Layer w0.7: R62.2 89.103,73.101 104.978,73.101 107.112,75.235 107.112,78.029 98.882,78.029 U26.6
NetR63_1: R63.1 R64.2 R65.1 | length 15.6
  Bottom Layer w0.7: R63.1 111.506,78.359 R64.2 119.888,84.201 120.142,84.455 R65.1
NetR65_2: R65.2 R68.1 U27.2 | length 48.8
  Top Layer w0.7: R68.1 117.653,64.567 117.653,73.736 116.027,75.362 116.027,77.902 118.643,77.902 119.71,76.835 R65.2
  Bottom Layer w0.7: U27.2 102.373,72.147 105.955,72.147 106.223,72.415 111.227,72.415 112.522,71.12 112.522,67.845 116.332,64.035 R68.1
NetR66_2: R66.2 R67.1 U27.3 | length 22.8
  Bottom Layer w0.7: R66.2 93.599,70.485 U27.3 102.337,61.747 108.991,61.747 R67.1
NetR69_3: R69.3 R70.2 | length 16.8
  Top Layer w0.7: R69.3 25.146,47.219 30.48,52.553 R70.2
NetR70_1: R70.1 R72.1 U28.3 | length 25.3
  Top Layer w0.7: R72.1 37.389,35.611 37.389,43.205 35.585,45.009 35.585,48.92 U28.3
  Bottom Layer w0.7: R70.1 32.766,50.292 U28.3
NetR71_1: R71.1 R73.2 U28.2 | length 27.2
  Top Layer w0.7: U28.2 42.037,47.752 R73.2
  Bottom Layer w0.7: R71.1 32.715,36.525 36.652,36.525 R73.2
NetR74_1: R74.1 R79.2 U29.2 | length 25.3
  Top Layer w0.7: U29.2 52.146,49.708 52.146,35.484 R74.1
  Bottom Layer w0.7: R74.1 55.931,34.163 56.058,34.036 R79.2
NetR76_1: R76.1 U29.3 | length 17.6
  Top Layer w0.7: R76.1 50.648,37.059 50.648,48.666 U29.3
NetR77_1: R77.1 U30.3 | length 24
  Top Layer w0.7: U30.3 60.876,48.43 60.876,46.287 61.671,45.491 62.84,45.491 R77.1
NetR78_1: R78.1 U31.3 | length 19.8
  Top Layer w0.7: R78.1 88.697,34.214 88.697,47.041 U31.3
NetR79_1: R79.1 R81.2 U29.6 | length 16
  Top Layer w0.7: U29.6 55.423,48.565 55.423,44.78 R79.1
  Bottom Layer w0.7: R79.1 58.704,41.499 63.249,41.499 63.406,41.656 R81.2
NetR80_1: R80.1 R83.2 U31.6 | length 10.6
  Top Layer w0.7: U31.6 104.013,54.737 R80.1
  Bottom Layer w0.7: R80.1 105.969,55.626 106.223,55.372 R83.2
NetR81_1: R81.1 R82.1 R83.1 R85.2 U32.2 | length 82.2
  Top Layer w0.7: R81.1 66.751,31.42 80.645,31.42 81.331,32.106 81.331,37.16 R82.1 ; U32.2 108.56,39.726 108.56,42.189 108.204,42.545 R83.1
  Bottom Layer w0.7: R82.1 81.178,37.313 106.147,37.313 U32.2 ; R83.1 108.204,52.756 112.674,57.226 116.383,57.226 R85.2
NetR84_1: R84.1 U32.3 | length 14.7
  Top Layer w0.7: U32.3 113.284,41.91 R84.1
pads on no net: U20.8 U20.9 U20.10 U20.11 U20.13 U20.14 U21.1 U21.5 U21.8 U22.1 U22.5 U22.8 U23.1 U23.5 U23.8 U24.1 U24.5 U24.8 U25.1 U25.5 U25.8 U26.1 U26.5 U26.8 U27.1 U27.5 U27.8 U28.1 U28.5 U28.8 U29.1 U29.5 U29.8 U30.1 U30.5 U30.8 U31.1 U31.5 U31.8 U32.1 U32.5 U32.8

## Polygon pours and split planes (outlines as drawn)
GND on Top Layer "NONET_L-01_P-001" (solid, pour order 2): 20.828,134.874 133.985,134.874 134.366,134.493 134.366,26.67 20.828,26.67 20.701,26.797

## Other copper
Top Layer:
  text "G25 Hot-Plate" at 113.284,126.746 h1.52

## Text inside footprints (layer, text, board x,y; h text height)
C11: Top Overlay "+" at 81.411,114.325 h1.5
C12: Top Overlay "+" at 40.136,115.976 h1.5
C13: Top Overlay "+" at 63.758,114.452 h1.5
C14: Top Overlay "+" at 82.046,96.926 h1.5
C15: Top Overlay "+" at 39.755,97.561 h1.5
C16: Top Overlay "+" at 64.139,97.053 h1.5
C18: Top Overlay "+" at 96.037,30.222 h1.5 r270
C19: Top Overlay "+" at 81.432,42.922 h1.5 r270
C20: Top Overlay "+" at 123.596,29.841 h1.5 r270
D9: Top Overlay "+" at 86.244,94.269 h1.5 r90; Top Overlay "-" at 94.488,102.235 h1.5 r90; Top Overlay "~" at 94.996,94.107 h1.5 r90; Top Overlay "~" at 86.868,102.235 h1.5 r90